# Altium PCB Eurocard VME 3U (3.937 x 6.299 inches).PCBDOC (part 1 of 2)
Units mil, origin at the board's own origin, x right, y up, seen from the top; angles counter-clockwise.
Board outline 6299 x 3937 mil, 2 copper layers (TopLayer, BottomLayer), stack 40.6 mil thick; 66 components, 125 nets, 577 pads, 748 vias.
Unrouted connection lines stored in the file: 53.
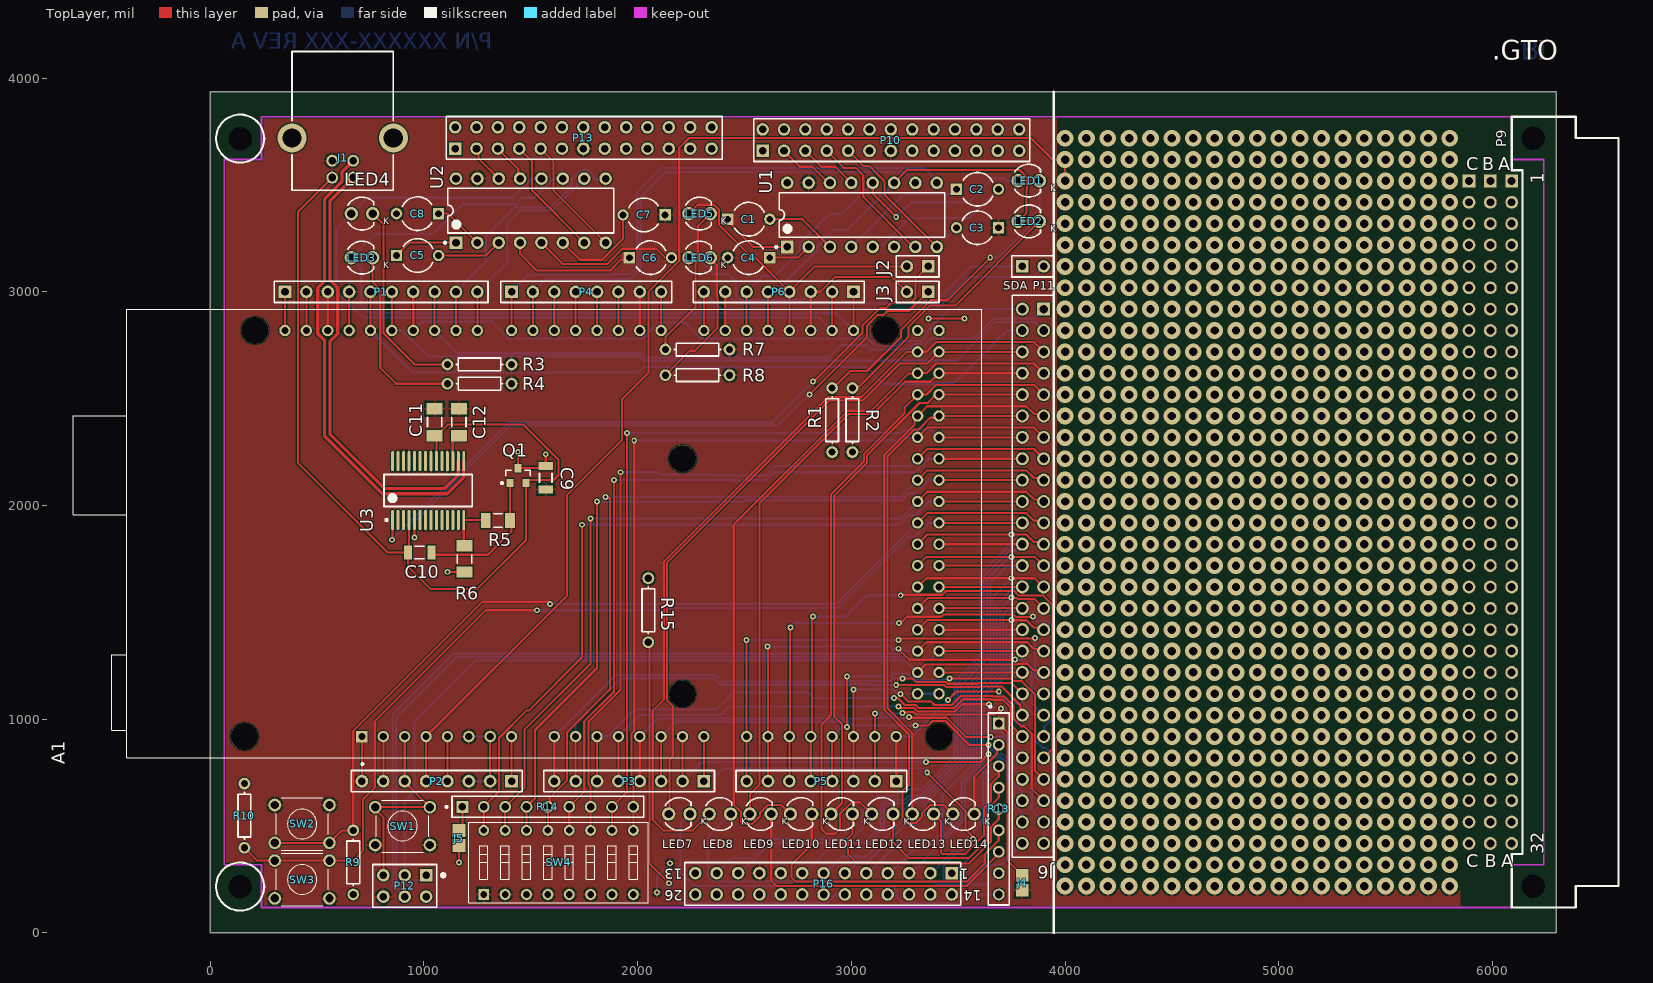
[diagram p0: TopLayer view]
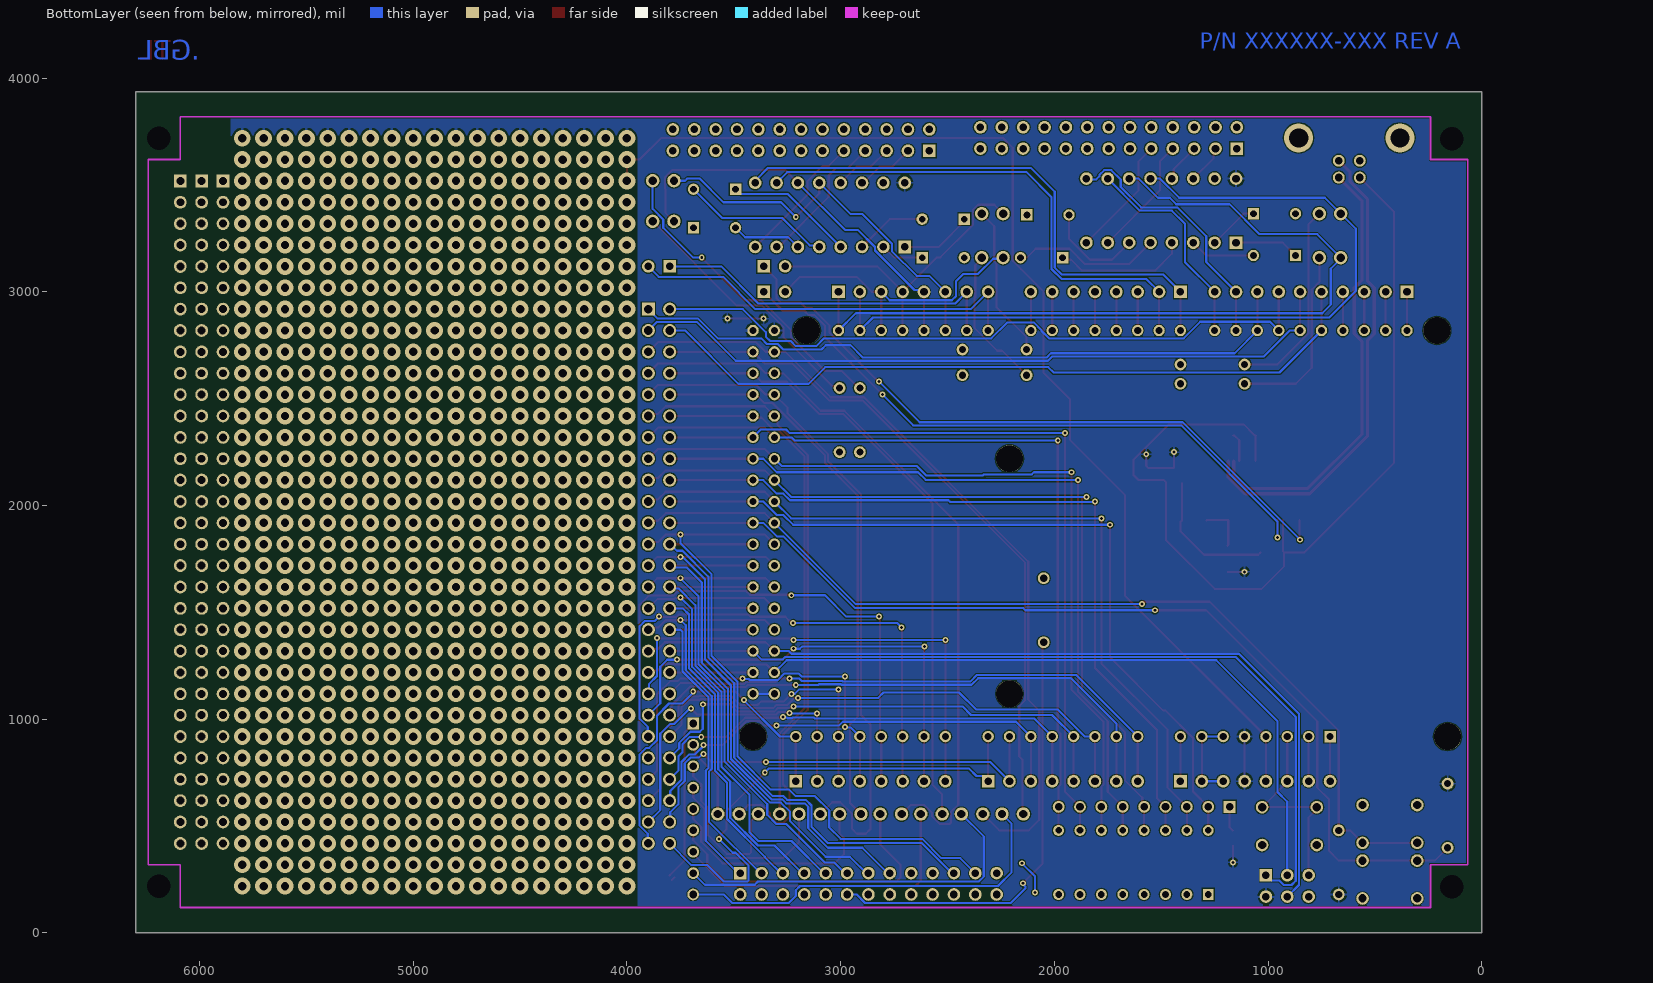
[diagram p1: BottomLayer view, seen from below]

## Layer stack, top to bottom
TopSolder: solder mask 0.4, Solder Resist, Dk 3.5
TopLayer: signal copper 1.4
Dielectric2: core 12.6, FR-4, Dk 4.8
Dielectric5: core 12.6, FR-4, Dk 4.8
Dielectric8: core 12.6, FR-4, Dk 4.8
BottomLayer: signal copper 1.4
BottomSolder: solder mask 0.4, Solder Resist, Dk 3.5

## Board outline
0,0 6299,0 6299,3937 0,3937

## Design rules (kind name [scope] priority, off if disabled: settings)
Clearance [All] p1: gap=5 ignorepadtopadclearanceinfootprint=FALSE
ComponentClearance ComponentClearance_1 [All] p1 off: gap=10 collisioncheckmode=3 verticalgap=10 showdistances=FALSE
ComponentClearance [InComponent('A1')] p2 off: gap=10 collisioncheckmode=3 verticalgap=0 showdistances=TRUE
DiffPairsRouting [All] p1: maxlimit=10 minlimit=10 mostfreqgap=10 toplayer_minwidth=15 toplayer_maxwidth=15 toplayer_prefwidth=15 bottomlayer_minwidth=15 bottomlayer_maxwidth=15 bottomlayer_prefwidth=15 maxuncoupledlength=500
FabricationTestPointUsage TestPointUsage [All] p1: valid=0 allowmultiple=FALSE
FabricationTestpoint Testpoint [All] p1: side=3 testpointundercomponent=TRUE minsize=40 maxsize=100 preferedsize=60 minholesize=20 maxholesize=40 preferedholesize=32 testpointgrid=1 allowsidetop=TRUE allowsidebottom=TRUE usegrid=TRUE gridtolerance=0.01
HoleSize [All] p1: absolutevalues=TRUE maxlimit=248.03 minlimit=11.81 maxpercent=80.000 minpercent=20.000
PlaneClearance [All] p1: clearance=10
PolygonConnect [All] p1: connectstyle=Relief reliefconductorwidth=10 reliefentries=4 polygonreliefangle="90 Angle" airgapwidth=10
RoutingVias [All] p1: holewidth=13.78 width=27.56 viastyle="Through Hole" minholewidth=11.81 minwidth=23.62 maxholewidth=19.68 maxwidth=39.37
SilkToSolderMaskClearance SilkscreenOverComponentPads [IsPad] p1: minsilkscreentomaskgap=10 clearancetoexposedcopper=TRUE
SolderMaskExpansion [All] p1: expansion=2
Width [All] p1: maxlimit=10 minlimit=10 preferedwidth=10
23 further rules are at their usual default settings.

## Classes and differential pairs
net class Tactile[1..2]: Tactile1 Tactile2
net class Relais[1..4]: Relais1 Relais2 Relais3 Relais4
net class LED[1..8]: LED1 LED2 LED3 LED4 LED5 LED6 LED7 LED8
net class Ch[1..8]: Ch1 Ch2 Ch3 Ch4 Ch5 Ch6 Ch7 Ch8
net class Button[1..8]: Button1 Button2 Button3 Button4 Button5 Button6 Button7 Button8
component class U_Serial: C1 C2 C3 C4 C5 C6 C7 C8 C9 C10 C11 C12 J1 J2 J3 LED1 LED2 LED3 LED4 LED5 LED6 P10 P11 P12 P13 Q1 R1 R2 R3 R4 R5 R6 R7 R8 U1 U2 U3
component class U_Ports: J6
component class U_Peripherals: J4 J5 LED7 LED8 LED9 LED10 LED11 LED12 LED13 LED14 P16 R9 R10 R13 R14 R15 SW2 SW3 SW4
component class "U_Eurocard VME 3U (3": P9
component class U_Arduino: A1 P1 P2 P3 P4 P5 P6 SW1
differential pair USB: +USB_P -USB_N

## Components (designator, comment, footprint, x,y, rotation, side; value= is the part's Value field where it differs from the comment)
A1 "ARDUINO_MEGA2560_REV3_-_RETAIL" *ARDUINO_MEGA2560_REV3_-_RETAIL_ARDUINO_MEGA2560_REV3_-_RETAIL(Primary) 1610,1869 r90 top locked
C1 "Cap2" CAPR5-4X5 2520,3340 r0 top value=1uF
C2 "Cap2" CAPR5-4X5 3590,3480 r0 top value=1uF
C3 "Cap2" CAPR5-4X5 3590,3300 r180 top value=1uF
C4 "Cap2" CAPR5-4X5 2520,3160 r180 top value=1uF
C5 "Cap2" CAPR5-4X5 970,3170 r0 top value=1uF
C6 "Cap2" CAPR5-4X5 2060,3160 r0 top value=1uF
C7 "Cap2" CAPR5-4X5 2030,3360 r180 top value=1uF
C8 "Cap2" CAPR5-4X5 970,3365.91 r180 top value=1uF
C9 "0.1uF" CAPC1206(3216)130_L 1570,2130 r270 top
C10 "0.1uF" CAPC1206(3216)130_L 980,1780 r0 top
C11 "10nF" CAPC1206(3216)130_M 1050,2390 r270 top
C12 "10nF" CAPC1206(3216)130_M 1163.39,2390 r270 top
J1 "61400416121" 61400416121 620,3800 r180 top
J2 "RX Jumper" HDR1X2 3360,3119 r180 top
J3 "TX Jumper" HDR1X2 3360,3000 r180 top
J4 "Jumper" SMDJumper 3800,270 r270 top
J5 "Jumper" SMDJumper 1164,408.74 r90 top
J6 "SSQ-126-22-T-D" SMTC-SSQ-126-22-X-D 3900,2919 r270 top
LED1 "RX1" "Type 3mm" 3830,3520 r0 top
LED2 "TX1" "Type 3mm" 3830,3330 r0 top
LED3 "TX3" "Type 3mm" 710,3160 r0 top
LED4 "RX3" "Type 3mm" 710,3365.91 r0 top
LED5 "RX2" "Type 3mm" 2290,3365.91 r0 top
LED6 "TX2" "Type 3mm" 2290,3160 r0 top
LED7 "TX1" "Type 3mm" 2195,556.55 r0 top
LED8 "TX1" "Type 3mm" 2385,556.55 r0 top
LED9 "TX1" "Type 3mm" 2575,556.55 r0 top
LED10 "TX1" "Type 3mm" 2765,556.55 r0 top
LED11 "TX1" "Type 3mm" 2955,556.55 r0 top
LED12 "TX1" "Type 3mm" 3145,556.55 r0 top
LED13 "TX1" "Type 3mm" 3335,556.55 r0 top
LED14 "TX1" "Type 3mm" 3525,556.55 r0 top
P1 "Header 10" HDR1X10 350,3000 r0 top
P2 "Header 8" HDR1X8 1410,710 r180 top
P3 "Header 8" HDR1X8 2310,710 r180 top
P4 "Header 8" HDR1X8 1410,3000 r0 top
P5 "Header 8" HDR1X8 3210,710 r180 top
P6 "Header 8" HDR1X8 3010,3000 r180 top
P9 "CNVME96" CNVME96 6090,3519 r90 top locked
P10 "Header 13X2A" HDR2X13_CEN 2585,3660 r0 top
P11 "Header 2" HDR1X2 3800,3119 r0 top
P12 "ISP" HDR2X3 1010,270 r180 top
P13 "Header 13X2A" HDR2X13_CEN 1146,3670 r0 top
P16 "Header 13X2A" HDR2X13_CEN 3470,280 r180 top
Q1 "IRLML6402TRPBF" INTR-SOT-23-3_V 1440,2140 r0 top
R1 "Res1" AXIAL-0.3 2910,2400 r90 top value=330
R2 "Res1" AXIAL-0.3 3005,2400 r90 top value=330
R3 "Res1" AXIAL-0.3 1260,2570 r180 top value=330
R4 "Res1" AXIAL-0.3 1260,2660 r0 top value=330
R5 "1K 1% 1206(3216)" RESC1206(3216)_N 1346,1930 r0 top value="1000.00 Ohm"
R6 "10K" RESC1206(3216)_M 1190,1750 r270 top value="10000.00 Ohm"
R7 "Res1" AXIAL-0.3 2280,2730 r180 top value=330
R8 "Res1" AXIAL-0.3 2280,2610 r0 top value=330
R9 "Res1" AXIAL-0.3 669.21,330 r90 top value=1K
R10 "Res1" AXIAL-0.3 160,548.82 r90 top value=1K
R13 "4609X-101-103LF" BOUR-4609X 3690,580 r270 top
R14 "4609X-101-103LF" BOUR-4609X 1580,590 r0 top
R15 "Res1" AXIAL-0.3 2050,1510 r270 top value=220
SW1 "430156130726" 430156130726 900,500 r180 top
SW2 "430156130726" 430156130726 430,510 r0 top
SW3 "430156130726" 430156130726 430,250 r0 top
SW4 "418117270908" 418117270908 1630,330 r0 top
U1 "MAX232N" N0016A 3050,3360 r90 top
U2 "MAX232N" N0016A 1500,3380 r90 top
U3 "FT232RL-Reel" SSOP-28_M 1020,2070 r90 top

## Footprints (in the part's own frame and the unit in brackets; to place one, negate y for a bottom-side part, rotate by r counter-clockwise, add the part's x,y. Pads: shape width x height; smd on the part's side, far side on the other; paste and mask are expansions set on the pad)
61400416121 [mm] "USB 2.0 Type B Horizontal"
  round 1.42 hole 0.92: 1(1.25,6.74) 2(-1.25,6.74) 3(-1.25,4.74) 4(1.25,4.74)
  round 3.45 hole 2.3: Shell(-6.02,2.03) Shell(6.02,2.03)
  silkscreen extent -6.02,-8.25 6.02,8.25, body extent -7.48,-8.25 7.48,8.25, height 11.08
418117270908 [mm] "08p, 2.54mm Pitch, Horizontal, Box Type, THT, raised Actuator, red, without Tape, Tube"
  rect 1.3x1.3 hole 0.8: 1(-8.89,-3.81)
  round 1.3 hole 0.8: 2(-6.35,-3.81) 3(-3.81,-3.81) 4(-1.27,-3.81) 5(1.27,-3.81) 6(3.81,-3.81) 7(6.35,-3.81) 8(8.89,-3.81) 9(8.89,3.81) 10(6.35,3.81) 11(3.81,3.81) 12(1.27,3.81) 13(-1.27,3.81) 14(-3.81,3.81) 15(-6.35,3.81) 16(-8.89,3.81)
  silkscreen extent -10.66,-4.8 10.66,4.8, body extent -10.66,-4.8 10.66,4.8, height 6.5
430156130726 [mm] "6*6mm vertical type, THT, height 13.0mm, white actuator, 260gf, Bulk"
  round 1.5 hole 1: 1(-3.25,2.25) 2(-3.25,-2.25) 3(3.25,2.25) 4(3.25,-2.25)
  silkscreen extent -3.1,-3.1 3.1,3.1, body extent -3.95,-3.1 3.95,3.1, height 13.01
*ARDUINO_MEGA2560_REV3_-_RETAIL_ARDUINO_MEGA2560_REV3_-_RETAIL(Primary) [mm]
  round 1.358 hole 0.85: 0(24.13,-12.7) 1(24.13,-10.16) 2(24.13,-7.62) 3(24.13,-5.08) 3V3(-24.13,15.24) 4(24.13,-2.54) 5(24.13,0) 5V_1(-24.13,12.7) 5V_2(24.13,-43.18) 5V_3(24.13,-45.72) 6(24.13,2.54) 7(24.13,5.08) 8(24.13,9.144) 9(24.13,11.684) 10(24.13,14.224) 11(24.13,16.764) 12(24.13,19.304) 13(24.13,21.844) 14(24.13,-17.78) 15(24.13,-20.32) 16(24.13,-22.86) 17(24.13,-25.4) 18(24.13,-27.94) 19(24.13,-30.48) 20(24.13,-33.02) 21(24.13,-35.56) 22(21.59,-43.18) 23(21.59,-45.72) 24(19.05,-43.18) 25(19.05,-45.72) 26(16.51,-43.18) 27(16.51,-45.72) 28(13.97,-43.18) 29(13.97,-45.72) 30(11.43,-43.18) 31(11.43,-45.72) 32(8.89,-43.18) 33(8.89,-45.72) 34(6.35,-43.18) 35(6.35,-45.72) 36(3.81,-43.18) 37(3.81,-45.72) 38(1.27,-43.18) 39(1.27,-45.72) 40(-1.27,-43.18) 41(-1.27,-45.72) 42(-3.81,-43.18) 43(-3.81,-45.72) 44(-6.35,-43.18) 45(-6.35,-45.72) 46(-8.89,-43.18) 47(-8.89,-45.72) 48(-11.43,-43.18) 49(-11.43,-45.72) 50(-13.97,-43.18) 51(-13.97,-45.72) 52(-16.51,-43.18) 53(-16.51,-45.72) AD0(-24.13,0) AD1(-24.13,-2.54) AD2(-24.13,-5.08) AD3(-24.13,-7.62) AD4(-24.13,-10.16) AD5(-24.13,-12.7) AD6(-24.13,-15.24) AD7(-24.13,-17.78) AD8(-24.13,-22.86) AD9(-24.13,-25.4) AD10(-24.13,-27.94) AD11(-24.13,-30.48) AD12(-24.13,-33.02) AD13(-24.13,-35.56) AD14(-24.13,-38.1) AD15(-24.13,-40.64) AREF(24.13,26.924) GND1(-24.13,10.16) GND2(-24.13,7.62) GND3(24.13,24.384) GND4(-19.05,-43.18) GND5(-19.05,-45.72) IOREF(-24.13,20.32) RESET(-24.13,17.78) SCL(24.13,32.004) SDA(24.13,29.464) VIN(-24.13,5.08)
  rect 1.358x1.358 hole 0.85: NC(-24.13,22.86)
  round 3.2 hole 3.2 unplated: None(-24.13,36.83) None(-24.13,-45.72) None(-19.05,-15.24) None(8.89,-15.24) None(24.13,35.56) None(24.13,-39.37)
  silkscreen extent -27.52,-50.8 26.67,57.15
AXIAL-0.3 [mm] "Axial Device, Thru-Hole; 2 Leads; 0.3 in Pin Spacing"
  round 1.4 hole 0.85: 1(-3.81,0) 2(3.81,0)
  silkscreen extent -2.77,-0.76 2.77,0.76
BOUR-4609X [mm] "THD, 9-Leads, Body 22.81x2.49mm, Pitch 2.54mm"
  rect 1.4x1.4 hole 0.9: 1(-10.16,0)
  round 1.4 hole 0.9: 2(-7.62,0) 3(-5.08,0) 4(-2.54,0) 5(0,0) 6(2.54,0) 7(5.08,0) 8(7.62,0) 9(10.16,0)
  silkscreen extent -12.32,-1.25 11.41,1.25, body extent -11.38,-1.24 11.43,1.24, height 5.08
CAPC1206(3216)130_L [mm] "Chip Capacitor, Body 3.2x1.6mm, Height 1.3mm, IPC High Density"
  rect 0.95x1.7 smd: 1(-1.4,0) 2(1.4,0)
  silkscreen extent -0.55,-0.75 0.55,0.75, body extent -1.7,-0.9 1.7,0.9, height 1.3
CAPC1206(3216)130_M [mm] "Chip Capacitor, Body 3.2x1.6mm, Height 1.3mm, IPC Low Density"
  rect 1.35x1.9 smd: 1(-1.6,0) 2(1.6,0)
  silkscreen extent -0.55,-0.85 0.55,0.85, body extent -1.7,-0.9 1.7,0.9, height 1.3
CAPR5-4X5 [mm] "Capacitor; 2 Leads"
  rect 1.35x1.35 hole 0.8: 1(-2.5,0)
  round 1.35 hole 0.8: 2(2.5,0)
  silkscreen extent -1.69,-2 1.82,2
CNVME96 [mil]
  round 50 hole 110: 97(200,-100) 98(-3300,-100)
  rect 60x60 / inner round 60 / far side rect 60x60 hole 37: A1(0,0) B1(0,100) C1(0,200)
  round 60 hole 37: A2(-100,0) A3(-200,0) A4(-300,0) A5(-400,0) A6(-500,0) A7(-600,0) A8(-700,0) A9(-800,0) A10(-900,0) A11(-1000,0) A12(-1100,0) A13(-1200,0) A14(-1300,0) A15(-1400,0) A16(-1500,0) A17(-1600,0) A18(-1700,0) A19(-1800,0) A20(-1900,0) A21(-2000,0) A22(-2100,0) A23(-2200,0) A24(-2300,0) A25(-2400,0) A26(-2500,0) A27(-2600,0) A28(-2700,0) A29(-2800,0) A30(-2900,0) A31(-3000,0) A32(-3100,0) B2(-100,100) B3(-200,100) B4(-300,100) B5(-400,100) B6(-500,100) B7(-600,100) B8(-700,100) B9(-800,100) B10(-900,100) B11(-1000,100) B12(-1100,100) B13(-1200,100) B14(-1300,100) B15(-1400,100) B16(-1500,100) B17(-1600,100) B18(-1700,100) B19(-1800,100) B20(-1900,100) B21(-2000,100) B22(-2100,100) B23(-2200,100) B24(-2300,100) B25(-2400,100) B26(-2500,100) B27(-2600,100) B28(-2700,100) B29(-2800,100) B30(-2900,100) B31(-3000,100) B32(-3100,100) C2(-100,200) C3(-200,200) C4(-300,200) C5(-400,200) C6(-500,200) C7(-600,200) C8(-700,200) C9(-800,200) C10(-900,200) C11(-1000,200) C12(-1100,200) C13(-1200,200) C14(-1300,200) C15(-1400,200) C16(-1500,200) C17(-1600,200) C18(-1700,200) C19(-1800,200) C20(-1900,200) C21(-2000,200) C22(-2100,200) C23(-2200,200) C24(-2300,200) C25(-2400,200) C26(-2500,200) C27(-2600,200) C28(-2700,200) C29(-2800,200) C30(-2900,200) C31(-3000,200) C32(-3100,200)
  silkscreen extent -3400,-500 300,0
HDR1X2 [mm] "Connector; Header; 2 Position"
  rect 1.5x1.5 hole 0.9: 1(0,0)
  round 1.5 hole 0.9: 2(2.54,0)
  silkscreen extent -1.27,-1.27 3.81,1.27
HDR1X8 [mm] "Connector; Header; 8 Position"
  rect 1.5x1.5 hole 0.9: 1(0,0)
  round 1.5 hole 0.9: 2(2.54,0) 3(5.08,0) 4(7.62,0) 5(10.16,0) 6(12.7,0) 7(15.24,0) 8(17.78,0)
  silkscreen extent -1.27,-1.27 19.05,1.27
HDR1X10 [mm] "Connector; Header; 10 Position"
  rect 1.5x1.5 hole 0.9: 1(0,0)
  round 1.5 hole 0.9: 2(2.54,0) 3(5.08,0) 4(7.62,0) 5(10.16,0) 6(12.7,0) 7(15.24,0) 8(17.78,0) 9(20.32,0) 10(22.86,0)
  silkscreen extent -1.27,-1.27 24.13,1.27
HDR2X3 [mm] "Connector; Header; 3x2 Position"
  rect 1.5x1.5 hole 0.9: 1(0,0)
  round 1.5 hole 0.9: 2(0,2.54) 3(2.54,0) 4(2.54,2.54) 5(5.08,0) 6(5.08,2.54)
  silkscreen extent -1.27,-1.27 6.35,3.81
HDR2X13_CEN [mm] "Connector; Header; 13x2 Position"
  rect 1.5x1.5 hole 0.9: 1(0,0)
  round 1.5 hole 0.9: 2(2.54,0) 3(5.08,0) 4(7.62,0) 5(10.16,0) 6(12.7,0) 7(15.24,0) 8(17.78,0) 9(20.32,0) 10(22.86,0) 11(25.4,0) 12(27.94,0) 13(30.48,0) 14(0,2.54) 15(2.54,2.54) 16(5.08,2.54) 17(7.62,2.54) 18(10.16,2.54) 19(12.7,2.54) 20(15.24,2.54) 21(17.78,2.54) 22(20.32,2.54) 23(22.86,2.54) 24(25.4,2.54) 25(27.94,2.54) 26(30.48,2.54)
  silkscreen extent -1.06,-1.27 31.75,3.81
INTR-SOT-23-3_V [mm] "SOT23, 3-Leads, Body 2.92x1.3mm, Pitch 1.9mm"
  rect 0.802x0.972 smd: 1(-0.95,-0.885) 2(0.95,-0.885) 3(0,0.885)
  silkscreen extent -2.03,-1.01 1.46,0.64, body extent -1.46,-0.65 1.46,0.65, height 1.12
N0016A [mm] "DIP, 16-Leads, Body 19.7x6.6mm, Pitch 2.54mm"
  rect 1.5x1.5 hole 0.9: 1(-3.81,8.89)
  round 1.5 hole 0.9: 2(-3.81,6.35) 3(-3.81,3.81) 4(-3.81,1.27) 5(-3.81,-1.27) 6(-3.81,-3.81) 7(-3.81,-6.35) 8(-3.81,-8.89) 9(3.81,-8.89) 10(3.81,-6.35) 11(3.81,-3.81) 12(3.81,-1.27) 13(3.81,1.27) 14(3.81,3.81) 15(3.81,6.35) 16(3.81,8.89)
  silkscreen extent -3.93,-9.85 2.65,10.31, body extent -3.95,-9.85 3.95,9.85, height 5.08
RESC1206(3216)_M [mm] "Chip Resistor, Body 3.2x1.6mm, IPC Low Density"
  rect 1.35x1.9 smd: 1(-1.55,0) 2(1.55,0)
  silkscreen extent -0.5,-0.85 0.5,0.85, body extent -1.67,-0.87 1.67,0.87, height 0.75
RESC1206(3216)_N [mm] "Chip Resistor, Body 3.2x1.6mm, IPC Medium Density"
  rect 1.15x1.8 smd: 1(-1.45,0) 2(1.45,0)
  silkscreen extent -0.5,-0.8 0.5,0.8, body extent -1.67,-0.87 1.67,0.87, height 0.75
SMDJumper [mil]
  rect 60x60 smd: 1(0,0) 2(70,0)
SMTC-SSQ-126-22-X-D [mm] "SQ Post Socket, 2x26 Pins, Vertical, 2.54mm Pitch, Female"
  rect 1.55x1.55 hole 1.02: 1(0,0)
  round 1.55 hole 1.02: 2(0,-2.54) 3(2.54,0) 4(2.54,-2.54) 5(5.08,0) 6(5.08,-2.54) 7(7.62,0) 8(7.62,-2.54) 9(10.16,0) 10(10.16,-2.54) 11(12.7,0) 12(12.7,-2.54) 13(15.24,0) 14(15.24,-2.54) 15(17.78,0) 16(17.78,-2.54) 17(20.32,0) 18(20.32,-2.54) 19(22.86,0) 20(22.86,-2.54) 21(25.4,0) 22(25.4,-2.54) 23(27.94,0) 24(27.94,-2.54) 25(30.48,0) 26(30.48,-2.54) 27(33.02,0) 28(33.02,-2.54) 29(35.56,0) 30(35.56,-2.54) 31(38.1,0) 32(38.1,-2.54) 33(40.64,0) 34(40.64,-2.54) 35(43.18,0) 36(43.18,-2.54) 37(45.72,0) 38(45.72,-2.54) 39(48.26,0) 40(48.26,-2.54) 41(50.8,0) 42(50.8,-2.54) 43(53.34,0) 44(53.34,-2.54) 45(55.88,0) 46(55.88,-2.54) 47(58.42,0) 48(58.42,-2.54) 49(60.96,0) 50(60.96,-2.54) 51(63.5,0) 52(63.5,-2.54)
  silkscreen extent -1.65,-3.74 65.15,1.21, body extent -1.52,-3.75 65.02,1.21, height 8.51
SSOP-28_M [mm] "SOP, 28-Leads, Body 10.2x5.3mm, Pitch 0.65mm, IPC Low Density"
  oval 2.4x0.35 smd: 1(-3.5,4.225) 2(-3.5,3.575) 3(-3.5,2.925) 4(-3.5,2.275) 5(-3.5,1.625) 6(-3.5,0.975) 7(-3.5,0.325) 8(-3.5,-0.325) 9(-3.5,-0.975) 10(-3.5,-1.625) 11(-3.5,-2.275) 12(-3.5,-2.925) 13(-3.5,-3.575) 14(-3.5,-4.225) 15(3.5,-4.225) 16(3.5,-3.575) 17(3.5,-2.925) 18(3.5,-2.275) 19(3.5,-1.625) 20(3.5,-0.975) 21(3.5,-0.325) 22(3.5,0.325) 23(3.5,0.975) 24(3.5,1.625) 25(3.5,2.275) 26(3.5,2.925) 27(3.5,3.575) 28(3.5,4.225)
  silkscreen extent -3.62,-5.25 1.9,5.25, body extent -2.8,-5.25 2.8,5.25, height 2
"Type 3mm" [mm] "THT, LED-3mm, 2pin- Body 4.15mm(max)"
  round 1.6 hole 1: 1(1.27,0) 2(-1.27,0)
  silkscreen extent -1.66,-1.95 1.4,1.95, body extent -1.93,-1.94 1.87,1.94, height 10.5

## Part data
A1: "Dev.kit: Arduino; SPI, TWI, UART; ICSP, USB B, pin strips, supply", Package=None, Availability=Unavailable, MF=Arduino, MP="ARDUINO MEGA2560 REV3 - RETAIL", Price=None, SnapEDA_Link=https://www.snapeda.com/parts/ARDUINO%20MEGA2560%20REV3%20-%20RETAIL/Arduino/view-part/?ref=snap
C1 C2 C3 C4 C5 C6 C7 C8: "Capacitor", PackageDescription="Capacitor; 2 Leads", PackageReference=CAPR5-4X5, Published=23-Sep-2002, Publisher="Altium Limited"
C9 C10 C11 C12: library part CMP-1037-03460-1, "CAP 10nF 16V ±1% 1206 (3216 Metric) Thickness 1.3mm SMD", Case-EIA=1206, Case-Metric=3216, Rated Voltage="16 V", Tolerance=±1%, Max Thickness="1.3 mm", Technology=SMT
J1: library part CMP-1502-03243-1, "USB 2.0 Type B Receptacle WR-COM, Horizontal, THT, with Pads and Pegs", Contact Resistance=20mOhm, Manufacturer="Wurth Elektronik", Operating Temperature=-40to105degC, Rated Current=1.5A, Working Voltage=30VAC, Connector Type=USB2.0TypeB, Datasheet URL=https://katalog.we-online.de/em/datasheet/61400416121.pdf, Gender=Receptacle, Manufacturer URL=http://www.we-online.de, Mounting Technology=THT, Orientation=Horizontal, Package Reference=61400416121, Packaging=Tray, Part Number=61400416121, Publisher=WurthElektronik
J2 J3: library part "Header 2", "Header, 2-Pin", LatestRevisionDate=17-Jul-2002, LatestRevisionNote="Re-released for DXP Platform.", Publisher="Altium Limited"
J6: library part CMP-1023-00318-1, "SQ Post Socket, Through-hole, Vertical, -55 to 105 degC, 2.54 mm Pitch, 52-Pin, Female, RoHS", Manufacturer=Samtec, Temperature Range="-55 to 105 degC", ComponentLink1Description="Manufacturer URL", ComponentLink1URL=http://www.samtec.com, ComponentLink2Description=Datasheet, ComponentLink2URL=http://www.samtec.com/documents/webfiles/pdf/SSQ_TH.PDF, ComponentLink3Description="Package Specification", ComponentLink3URL=http://www.samtec.com/documents/webfiles/cpdf/SSQ-1XX-XX-XXX-X-XX-XXX-XX-X-MKT.pdf, DatasheetVersion=F-214, Mounting Technology=Through-hole, Orientation=Vertical, PackageDescription="Assembly, Socket Strip .025[0.64] SQ Tail", PackageReference=SSQ-126-22-X-D, PackageVersion="BD, 6/1987", PartNumber=SSQ-126-22-T-D, Pitch="2.54 mm", RoHS=True
LED1 LED2 LED3 LED4 LED5 LED6 LED7 LED8 LED9 LED10 LED11 LED12 LED13 LED14: library part CMP-1489-00003-1, "THT LED round mono-color waterclear, WL-TMRW, Yellow", Emitting color=Yellow, Manufacturer="Wuerth Elektronik", PartNumber=151033YS03000, ComponentLink1Description="Manufacturer URL", ComponentLink1URL=http://www.we-online.com, ComponentLink2Description=Datasheet, ComponentLink2URL=http://katalog.we-online.de/pbs/datasheet/7448042001.pdfhttp://katalog.we-online.de/pbs/datasheet/7448042001.pdfhttp://katalog.we-online.de/pbs/datasheet/7448042001.pdfhttp://katalog.we-online.de/pbs/datasheet/151033YS03000.pdf, PackageReference="Type 3mm"
P1: "Header, 10-Pin", LatestRevisionDate=17-Jul-2002, LatestRevisionNote="Re-released for DXP Platform.", Publisher="Altium Limited"
P2 P3 P4 P5 P6: "Header, 8-Pin", LatestRevisionDate=17-Jul-2002, LatestRevisionNote="Re-released for DXP Platform.", Publisher="Altium Limited"
P9: "96-Pin Connector (3x32 2.54mm grid)", Text Field6="Alternate Layout Available", Text Field7="Published 14-Feb-2002"
P10 P13 P16: "Header, 13-Pin, Dual row", LatestRevisionDate=17-Jul-2002, LatestRevisionNote="Re-released for DXP Platform.", Publisher="Altium Limited"
P11: "Header, 2-Pin", LatestRevisionDate=17-Jul-2002, LatestRevisionNote="Re-released for DXP Platform.", Publisher="Altium Limited"
P12: library part "Header 3X2", "Header, 3-Pin, Dual row", LatestRevisionDate=17-Jul-2002, LatestRevisionNote="Re-released for DXP Platform.", Publisher="Altium Limited"
Q1: library part CMP-2000-04987-1, "HEXFET(R) Power P-Channel MOSFET, -20 V, -3.7 A, -55 to 150 degC, 3-Pin SOT-23, RoHS, Tape and Reel", Drain-Source On Resistance-Max=0.065O, Drain-to-Source Voltage [Vdss]=20V, Manufacturer="International Rectifier", Package Description="3-Pin Small Outline Transistor, Body 2.92 x 1.3 mm, Pitch 0.95 mm", Package Reference=SOT-23-3, Rated Power Dissipation=1.3W, Channel Type=P-Channel, Datasheet URL=http://datasheet.octopart.com/IRLML6402TRPBF-International-Rectifier-datasheet-93882.pdf, Datasheet Version=Feb-05, Manufacturer URL=http://internationalrectifier.com/, Qg Gate Charge=8nC
R1 R2 R3 R4 R7 R8 R9 R10 R15: "Resistor", LatestRevisionDate=17-Jul-2002, LatestRevisionNote="Re-released for DXP Platform.", PackageDescription="Axial Device, Thru-Hole; 2 Leads; 0.3 in Pin Spacing", PackageReference=AXIAL-0.3, Published=8-Jun-2000, Publisher="Altium Limited"
R5: library part CMP-1014-00510-1, "1K 0.25W 1% 1206 (3216 Metric)  SMD", Case-EIA=1206, Case-Metric=3216, Power="0.25 W", Tolerance="1 %", Technology=SMT
R6: library part CMP-1014-00098-1, "10K 0.25W 5% 1206 (3216 Metric)  SMD", Case-EIA=1206, Case-Metric=3216, Power="0.25 W", Tolerance="5 %", Technology=SMT
R13 R14: library part CMP-2000-05605-1, "Resistor, Network, 1.13 W, 10 kOhm, -55 to 125 degC, 9-Pin THD, RoHS, Bulk", Manufacturer=Bourns, Number of Resistors=8, Package Description="9-Pin Through Hole Device, Body 22.81 x 2.49 mm, Pitch 2.54 mm", Package Reference=4609X, Package Type=SIP, Power, Rating=1.13W, Resistance=10kilohms, Temperature, Operating=-55to+125°C, Tolerance=±2%, Brand/Series=4600XSeries, Circuit=BussedArray, Datasheet URL=https://datasheet.ciiva.com/11807/0900766b8069ccfd-11807021.pdf, Datasheet Version=04/2010, Dimensions=0.898x0.098x0.2(22.81x2.49x5.08)LxWxHin.(mm), Manufacturer URL=http://www.bourns.com/, Mounting Technology=ThroughHole, Mounting Type=ThroughHole, Number of Terminals=9
SW1 SW2 SW3: library part CMP-1453-00009-1, "WS-TATV THT Tact Switch 6X6 mm", Manufacturer="Wuerth Elektronik", ComponentLink1Description="Manufacturer URL", ComponentLink1URL=http://www.we-online.com, ComponentLink2Description=Datasheet, ComponentLink2URL=http://katalog.we-online.de/em/datasheet/4301x6.pdf, NoPins=04, PackageReference=430156130726, PartNumber=430156130726
SW4: library part CMP-1435-00007-1, "WS-DITV 2.54 mm Compact THT Dip Switch with Raised Actuator", Manufacturer="Wuerth Elektronik", ComponentLink1Description="Manufacturer URL", ComponentLink1URL=http://www.we-online.com, ComponentLink2Description=Datasheet, ComponentLink2URL=http://katalog.we-online.de/em/datasheet/4181172709xx.pdf, NoPins=16, PackageReference=418117270908, PartNumber=418117270908
U1 U2: library part CMP-0299-00084-2, "Dual EIA-232 Driver / Receiver, 0 to 70 degC, 16-Pin PDIP (N), Pb-Free (RoHS)", Drivers Per Package=2, Supply Voltage(s)(V)=5, ComponentLink1Description="Manufacturer URL", ComponentLink1URL=www.ti.com, ComponentLink2Description=Datasheet, ComponentLink2URL=http://www.ti.com/general/docs/lit/getliterature.tsp?genericPartNumber=MAX232&fileType=pdf, ComponentLink3Description="Package Specification", ComponentLink3URL=http://www.ti.com/litv/pdf/mpdi002c, DatasheetVersion=SLLS047L, ESD HBM(kV)=+/-2, ICC(Max)(mA)=10, PackageDescription="16-Pin Plastic Dual-In-Line Package, Row Spacing 7.62 mm, Pitch 2.54 mm", PackageReference=N0016A, PackageVersion="revE, Dec-2002", Receivers Per Package=2, RS-232=TRUE, Single Supply=TRUE, SubFamily=RS-232
U3: library part CMP-0078-00029-3, "USB UART Asynchronous Serial Data Transfer Chip, 28-pin SSOP, Tape and Reel", Manufacturer=FTDI, ComponentLink1Description="Manufacturer URL", ComponentLink1URL=http://www.ftdichip.com/, ComponentLink2Description=Datasheet, ComponentLink2URL=http://www.ftdichip.com/Support/Documents/DataSheets/ICs/DS_FT232R.pdf, DatasheetVersion="ver 2.10, Mar-2012", PackageDescription="28-Pin Small Outline Package 0.65 mm Pitch", PackageReference=SSOP-28, PackageVersion=Mar-12, PartNumber=FT232RL-Reel, RevisionNote="DatasheetVersion updated to 2.10 Mar-2012"

## Free pads (board coordinates)
  round 50 hole 110: 1(140,3717) 2(140,217)

## Via types
v1: diameter 78.74, hole 39.37, TopLayer to BottomLayer, 684 vias
v2: diameter 27.56, hole 13.78, TopLayer to BottomLayer, 64 vias

## Nets (pads, with @x,y where several pads share a name; then routed paths per layer and width w, separated by ;. In a path a pad name is that pad's centre, name@x,y a point inside that pad or via, vN(x,y) a via of type N, cw(c..) or ccw(c..) an arc to the next point about the centre after c; other vN are vias at no path point)
2: A1.2 P4.6 | length 181
  TopLayer w10: A1.2@1910,2819 P4.6@1910,3000
3: A1.3 P4.5 | length 181
  TopLayer w10: A1.3@1810,2819 P4.5@1810,3000
4: A1.4 P4.4 | length 181
  TopLayer w10: A1.4@1710,2819 P4.4@1710,3000
5: A1.5 P4.3 | length 181
  TopLayer w10: A1.5@1610,2819 P4.3@1610,3000
10: A1.10 J6.1 P1.8 | length 3193.8
  TopLayer w10: A1.10@1050,2819 P1.8@1050,3000
  BottomLayer w10: A1.10@1050,2819 1156.44,2712.56 2016.13,2712.56 2036.25,2692.44 2895.93,2692.44 2953.49,2750 3070,2750 3090,2730 3269.05,2730 3294.78,2755.73 3345.73,2755.73 3372.27,2782.27 3574.71,2782.27 3666.95,2874.51 3855.51,2874.51 J6.1@3900,2919
11: A1.11 J6.2 P1.7 | length 3242.3
  TopLayer w10: A1.11@950,2819 P1.7@950,3000
  BottomLayer w10: A1.11@950,2819 991,2860 1317.05,2860 1394.78,2782.27 2025.22,2782.27 2060,2817.05 2060,2820.95 2094.78,2855.73 2221.32,2855.73 2294.78,2782.27 3077.73,2782.27 3113.99,2746.01 3210,2746.01 3234.72,2770.73 3330.73,2770.73 3350,2790 3350,2810.95 3458.05,2919 J6.2@3800,2919
12: A1.12 J6.3 P1.6 | length 3381.8
  TopLayer w10: A1.12@850,2819 P1.6@850,3000
  BottomLayer w10: A1.12@850,2819 898.05,2819 1019.49,2697.56 2009.92,2697.56 2030.03,2677.44 3491.1,2677.44 3673.17,2859.51 3859.49,2859.51 J6.3@3900,2819
13: A1.13 J6.4 P1.5 | length 3458.1
  TopLayer w10: A1.13@750,2819 P1.5@750,3000
  BottomLayer w10: A1.13@750,2819 946.56,2622.44 2002.82,2622.44 2027.94,2647.56 3072.44,2647.56 3150,2570 3478.6,2570 3727.6,2819 J6.4@3800,2819
AD0: A1.AD0 J6.38 P3.8 | length 2568.3
  TopLayer w10: P3.8@1610,710 A1.AD0@1610,919 ; v2(3240,1190) 3287.05,1190 3302.05,1175 3441.37,1175 3450.15,1166.22 3592,1166.22 3594.56,1168.78 3750.22,1168.78 J6.38@3800,1119
  BottomLayer w10: A1.AD0@1610,919 1897.99,1206.99 2363.01,1206.99 2393.78,1176.22 2989.85,1176.22 2992.41,1178.78 3181.59,1178.78 3192.81,1190 v2(3240,1190)
AD1: A1.AD1 J6.40 P3.7 | length 2545.6
  TopLayer w10: P3.7@1710,710 A1.AD1@1710,919 ; v2(3210,1160) 3435.16,1160 3443.94,1151.22 3598.22,1151.22 3600.77,1153.78 3702.62,1153.78 3791.89,1064.51 3791.89,1027.11 J6.40@3800,1019
  BottomLayer w10: A1.AD1@1710,919 1710,980 1921.99,1191.99 2356.79,1191.99 2387.57,1161.22 2996.06,1161.22 2998.62,1163.78 3100.81,1163.78 3104.59,1160 v2(3210,1160)
AD2: A1.AD2 J6.42 P3.6 | length 2451.7
  TopLayer w10: P3.6@1810,710 A1.AD2@1810,919 ; v2(3200,1100) 3216.22,1100 3248.95,1067.27 3299.94,1067.27 3315.22,1051.99 3480.48,1051.99 3522.27,1093.78 3654.85,1093.78 3657.41,1091.22 3708.78,1091.22 3744.49,1055.51 3744.49,974.51 J6.42@3800,919
  BottomLayer w10: A1.AD2@1810,919 1858.05,919 1985.06,1046.01 2367.01,1046.01 2446,1125 2799.34,1125 2824.34,1100 v2(3200,1100)
AD3: A1.AD3 J6.44 P3.5 | length 2366.3
  TopLayer w10: P3.5@1910,710 A1.AD3@1910,919 ; v2(3220,1060) 3227.73,1052.27 3293.73,1052.27 3309.01,1036.99 3486.7,1036.99 3519.7,1070 v2(3645,1070)
  BottomLayer w10: A1.AD3@1910,919 2011,1020 2390,1020 2430,1060 v2(3220,1060) ; v2(3645,1070) 3645,955.74 3659.4,941.34 3702.99,941.34 3755.09,889.24 3755.09,863.91 J6.44@3800,819
AD4: A1.AD4 J6.46 P3.4 | length 2221.6
  TopLayer w10: P3.4@2010,710 A1.AD4@2010,919 ; v2(3270,1010) 3273.01,1006.99 3446.45,1006.99 3535.88,917.56 v2(3652.44,917.56)
  BottomLayer w10: A1.AD4@2010,919 2094.33,1003.33 3119.85,1003.33 3125.3,1008.78 3224.68,1008.78 3228.75,1004.71 3248.45,1004.71 3252.53,1008.78 3268.78,1008.78 v2(3270,1010) ; v2(3652.44,917.56) 3705.56,917.56 3740.09,883.03 3740.09,845.26 3759.49,825.86 3759.49,759.51 J6.46@3800,719
AD5: A1.AD5 J6.48 P3.3 | length 2174.6
  TopLayer w10: P3.3@2110,710 A1.AD5@2110,919 ; v2(3301,970) 3357.77,970 3379.77,991.99 3440.23,991.99 3553.16,879.07 v2(3641.77,879.07)
  BottomLayer w10: A1.AD5@2110,919 2179.29,988.29 2989.85,988.29 3008.14,970 v2(3301,970) ; v2(3641.77,879.07) 3641.77,875.11 3681.28,835.6 3708.73,835.6 3744.49,799.84 3744.49,717.22 3797.2,664.51 3797.2,621.8 J6.48@3800,619
AD6: A1.AD6 J6.50 P3.2 | length 2103.5
  TopLayer w10: P3.2@2210,710 A1.AD6@2210,919 ; v2(3350,800) 3604.03,800 v2(3641.77,837.74)
  BottomLayer w10: P3.2@2210,710 2300,800 v2(3350,800) ; v2(3641.77,837.74) 3646.52,837.74 3663.66,820.6 3702.52,820.6 3729.49,793.63 3729.49,711.01 3759.49,681.01 3759.49,602.22 3797.2,564.51 3797.2,521.8 J6.50@3800,519
AD7: A1.AD7 J6.52 P3.1 | length 2391.9
  TopLayer w10: P3.1@2310,710 A1.AD7@2310,919 ; v2(3355,750) 3533.5,571.5 3533.5,486.36 3570.79,449.07 3570.79,440.79 v2(3570,440)
  BottomLayer w10: P3.1@2310,710 2334.53,734.53 2364.53,734.53 2400,770 3335,770 v2(3355,750) ; v2(3570,440) 3505.15,375.15 3491.96,375.15 3430.47,313.67 3430.47,246.33 3436.33,240.47 3546.33,240.47 3623.42,317.56 3698.56,317.56 J6.52@3800,419
AD8: A1.AD8 J6.37 P5.8 | length 2292.1
  TopLayer w10: P5.8@2510,710 A1.AD8@2510,919 v2(2510,1370) ; v2(3220,1370) 3224.75,1370 3233.24,1378.49 3858.49,1378.49 v2(3860,1380)
  BottomLayer w10: v2(2510,1370) v2(3220,1370) ; v2(3860,1380) 3859.49,1379.49 3859.49,1202.22 3897.2,1164.51 3897.2,1121.8 J6.37@3900,1119
AD9: A1.AD9 J6.39 P5.7 | length 2157.5
  TopLayer w10: v2(2607.81,1340) 2610,1337.81 A1.AD9@2610,919 P5.7@2610,710 ; v2(3220,1330) 3271.51,1278.49 3764.83,1278.49 v2(3766.35,1280)
  BottomLayer w10: v2(2607.81,1340) 3181.22,1340 3191.22,1330 v2(3220,1330) ; v2(3766.35,1280) 3767.86,1278.49 3811.51,1278.49 3844.49,1245.51 3844.49,1074.51 J6.39@3900,1019
AD10: A1.AD10 J6.41 P5.6 | length 2529.7
  TopLayer w10: P5.6@2710,710 A1.AD10@2710,919 2712.5,921.5 2712.5,1427.5 v2(2715,1430) ; v2(3222.21,1450) 3230,1450 3259.51,1479.51 3422.46,1479.51 3432.95,1490 3758.14,1490 3769.65,1478.49 3848.49,1478.49 v2(3850,1480)
  BottomLayer w10: v2(2715,1430) 2715.7,1430 2735.7,1450 v2(3222.21,1450) ; v2(3850,1480) 3870.49,1459.51 3916.78,1459.51 3940.51,1435.78 3940.51,1002.22 3902.8,964.51 3902.8,921.8 J6.41@3900,919
AD11: A1.AD11 J6.43 P5.5 | length 2704.5
  TopLayer w10: P5.5@2810,710 A1.AD11@2810,919 2816.64,925.64 2816.64,1476.64 v2(2820,1480) ; v2(3231,1580) 3233.27,1582.27 3425.22,1582.27 3442.95,1600 3761.71,1600 3783.22,1578.49 3897.8,1578.49 3940.51,1535.78 3940.51,859.51 J6.43@3900,819
  BottomLayer w10: v2(2820,1480) 2973.12,1480 3073.12,1580 v2(3231,1580)
AD12: A1.AD12 J6.45 P5.4 | length 1879.7
  TopLayer w10: P5.4@2910,710 A1.AD12@2910,919 ; v2(2980,964.51) v2(2980,1200) ; v2(3460,1190) 3750.21,1190 3761.73,1178.49 3797.8,1178.49 3859.49,1116.8 3859.49,759.51 J6.45@3900,719
  BottomLayer w10: A1.AD12@2910,919 2952.15,961.15 2976.64,961.15 v2(2980,964.51) ; v2(2980,1200) 3181.6,1200 3195.38,1213.78 3263.27,1213.78 3294.78,1182.27 3425.22,1182.27 3431.22,1188.27 3458.27,1188.27 v2(3460,1190)
AD13: A1.AD13 J6.47 P5.3 | length 1756
  TopLayer w10: P5.3@3010,710 A1.AD13@3010,919 v2(3010,1140) ; v2(3230.85,1119) 3267.58,1082.27 3373.57,1082.27 3388.85,1066.99 3469.84,1066.99 3511.62,1108.78 3661.06,1108.78 3663.62,1106.22 3714.99,1106.22 3759.49,1061.73 3759.49,1002.22 3794.7,967.01 3809.28,967.01 3844.49,931.8 3844.49,674.51 J6.47@3900,619
  BottomLayer w10: v2(3010,1140) 3193.63,1140 3214.63,1119 v2(3230.85,1119)
AD14: A1.AD14 J6.49 P5.2 | length 1569.7
  TopLayer w10: P5.2@3110,710 A1.AD14@3110,919 3100,919 3110,929 v2(3110,1027.11) ; v2(3238.6,1028.49) 3241.96,1031.85 3258.22,1031.85 3260.15,1033.78 3291.01,1033.78 3302.79,1021.99 3671.99,1021.99 v2(3700,1050)
  BottomLayer w10: v2(3110,1027.11) 3233.15,1027.11 3234.53,1028.49 v2(3238.6,1028.49) ; v2(3700,1050) 3705.65,1050 3777.16,978.49 3797.8,978.49 3844.49,931.8 3844.49,574.51 J6.49@3900,519
AD15: A1.AD15 J6.51 P5.1 | length 1653.9
  TopLayer w10: P5.1@3210,710 A1.AD15@3210,919 ; v2(3452.87,1090.77) 3492.1,1130 v2(3690,1130)
  BottomLayer w10: A1.AD15@3210,919 3283.63,919 3452.87,1088.24 v2(3452.87,1090.77) ; v2(3690,1130) 3690,1125 3741.6,1073.4 3802.89,1073.4 3859.49,1016.8 3859.49,902.22 3895.89,865.82 3910.48,865.82 3940.51,835.78 3940.51,502.22 3902.8,464.51 3902.8,421.8 J6.51@3900,419
AREF: A1.AREF P1.3 | length 181
  TopLayer w10: A1.AREF@550,2819 P1.3@550,3000
Button1: A1.37 J6.20 R14.2 SW4.16 | length 3731.8
  TopLayer w10: SW4.16@1280,480 R14.2@1280,590 1351.58,661.58 1351.58,912.53 1479.53,1040.47 1490,1040.47 1740,1290.47 v2(1740,1910) ; A1.37@3410,2019 J6.20@3800,2019
  BottomLayer w10: v2(1740,1910) 3222.21,1910 3267.95,1955.73 3298.68,1955.73 3361.95,2019 A1.37@3410,2019
Button2: A1.36 J6.19 R14.3 SW4.15 | length 3816.1
  TopLayer w10: SW4.15@1380,480 R14.3@1380,590 1470,680 1470,950.47 1780,1260.47 v2(1780,1940) ; A1.36@3310,2019 3355.51,2064.51 3818.85,2064.51 3854.6,2028.76 3890.24,2028.76 J6.19@3900,2019
  BottomLayer w10: v2(1780,1940) 3231,1940 A1.36@3310,2019
Button3: A1.35 J6.18 R14.4 SW4.14 | length 3709.4
  TopLayer w10: SW4.14@1480,480 R14.4@1480,590 1520,630 1520,950 1810,1240 v2(1810,2019) ; A1.35@3410,2119 J6.18@3800,2119
  BottomLayer w10: v2(1810,2019) 1812.78,2016.22 2487,2016.22 2495.78,2025 3237.21,2025 3267.95,2055.73 3298.68,2055.73 3361.95,2119 A1.35@3410,2119
Button4: A1.34 J6.17 R14.5 SW4.13 | length 3817.1
  TopLayer w10: SW4.13@1580,480 R14.5@1580,590 1588.46,598.46 1588.46,632.56 1670,714.1 1670,940 1870,1140 1870,2034.14 1867.5,2036.64 1853.36,2036.64 v2(1850,2040) ; A1.34@3310,2119 3355.51,2164.51 3818.85,2164.51 3854.6,2128.76 3890.24,2128.76 J6.17@3900,2119
  BottomLayer w10: v2(1850,2040) 3231,2040 A1.34@3310,2119
Button5: A1.33 J6.16 R14.6 SW4.12 | length 3678
  TopLayer w10: SW4.12@1680,480 R14.6@1680,590 1750,660 1750,990 1890,1130 v2(1890,2120) ; A1.33@3410,2219 J6.16@3800,2219
  BottomLayer w10: v2(1890,2120) 2601.99,2120 2637.73,2155.73 3298.68,2155.73 3361.95,2219 A1.33@3410,2219
Button6: A1.32 J6.15 R14.7 SW4.11 | length 3798.4
  TopLayer w10: SW4.11@1780,480 R14.7@1780,590 1780,684.1 1770.47,693.63 1770.47,989.24 1920,1138.77 v2(1920,2155.73) ; A1.32@3310,2219 3355.51,2264.51 3854.49,2264.51 J6.15@3900,2219
  BottomLayer w10: v2(1920,2155.73) 2095.52,2155.73 2105.24,2146.01 2329.14,2146.01 2335,2140.15 2598.58,2140.15 2643.77,2185.34 3276.34,2185.34 A1.32@3310,2219
Button7: A1.31 J6.14 R14.8 SW4.10 | length 3760.7
  TopLayer w10: SW4.10@1880,480 R14.8@1880,590 1950,660 v2(1950,2340) ; A1.31@3410,2319 J6.14@3800,2319
  BottomLayer w10: v2(1950,2340) 3240,2340 3255.73,2355.73 3373.27,2355.73 A1.31@3410,2319
Button8: A1.30 J6.13 R14.9 SW4.9 | length 3793.5
  TopLayer w10: SW4.9@1980,480 R14.9@1980,590 1980,684.1 1970.47,693.63 1970.47,931.42 1984,944.95 v2(1984,2304) ; A1.30@3310,2319 3355.51,2364.51 3854.49,2364.51 J6.13@3900,2319
  BottomLayer w10: v2(1984,2304) 3215.21,2304 3230.21,2319 A1.30@3310,2319
Ch1: A1.49 J6.32 P16.1 | length 1716.7
  TopLayer w10: A1.49@3410,1419 J6.32@3800,1419
  BottomLayer w10: P16.1@3470,270 3631.5,431.5 3631.5,759.81 3617.99,773.31 3617.99,1101.62 3740,1223.63 3740,1409.85 3749.15,1419 J6.32@3800,1419
Ch2: A1.48 J6.31 P16.2 | length 1987.2
  TopLayer w10: A1.48@3310,1419 3355.51,1464.51 v2(3750,1464.51) 3751.02,1463.49 3819.88,1463.49 3854.6,1428.76 3890.24,1428.76 J6.31@3900,1419
  BottomLayer w10: P16.2@3370,273.63 3370,274.41 3616.5,520.91 3616.5,753.59 3602.99,767.1 3602.99,1107.83 3725,1229.84 3725,1439.51 v2(3750,1464.51)
Ch3: A1.47 J6.30 P16.3 | length 1895.1
  TopLayer w10: A1.47@3410,1519 3411,1520 3799,1520 J6.30@3800,1519
  BottomLayer w10: P16.3@3270,270 3355,355 3355,356.65 3531.5,533.15 3531.5,702.71 3587.99,759.21 3587.99,1116.99 3710,1239 3710,1490 3739,1519 J6.30@3800,1519
Ch4: A1.46 J6.29 P16.4 | length 2217.7
  TopLayer w10: A1.46@3310,1519 3358.27,1567.27 3747.27,1567.27 v2(3750,1570) 3753.36,1566.64 3773.85,1566.64 3777.01,1563.49 3855.51,1563.49 J6.29@3900,1519
  BottomLayer w10: P16.4@3170,270 3309.38,409.38 3386.51,409.38 3516.5,539.36 3516.5,708.92 3572.99,765.42 3572.99,1123.21 3695,1245.21 3695,1515 v2(3750,1570)
Ch5: A1.45 J6.28 P16.5 | length 2153
  TopLayer w10: A1.45@3410,1619 J6.28@3800,1619
  BottomLayer w10: P16.5@3070,270 3230,430 3385.92,430 3426.5,470.58 3426.5,647.1 3557.99,778.6 3557.99,1129.42 3680,1251.43 3680,1533.63 3758.19,1611.81 3779.01,1611.81 3786.19,1619 J6.28@3800,1619
Ch6: A1.44 J6.27 P16.6 | length 2390.4
  TopLayer w10: A1.44@3310,1619 3351,1660 v2(3750,1660) 3859,1660 J6.27@3900,1619
  BottomLayer w10: P16.6@2970,270 3030,330 3074.1,330 3254.1,510 3301,510 3343.5,552.5 3343.5,602.01 3542.99,801.5 3542.99,1135.63 3665,1257.64 3665,1575 v2(3750,1660)